# Altium PCB 5v.PcbDoc
Units mil, origin at the board's own origin, x right, y up, seen from the top; angles counter-clockwise.
Board outline 6861.22 x 4282.48 mil, 2 copper layers (Top Layer, Bottom Layer); 30 components, 12 nets, 75 pads, 0 vias.
Unrouted connection lines stored in the file: 1.
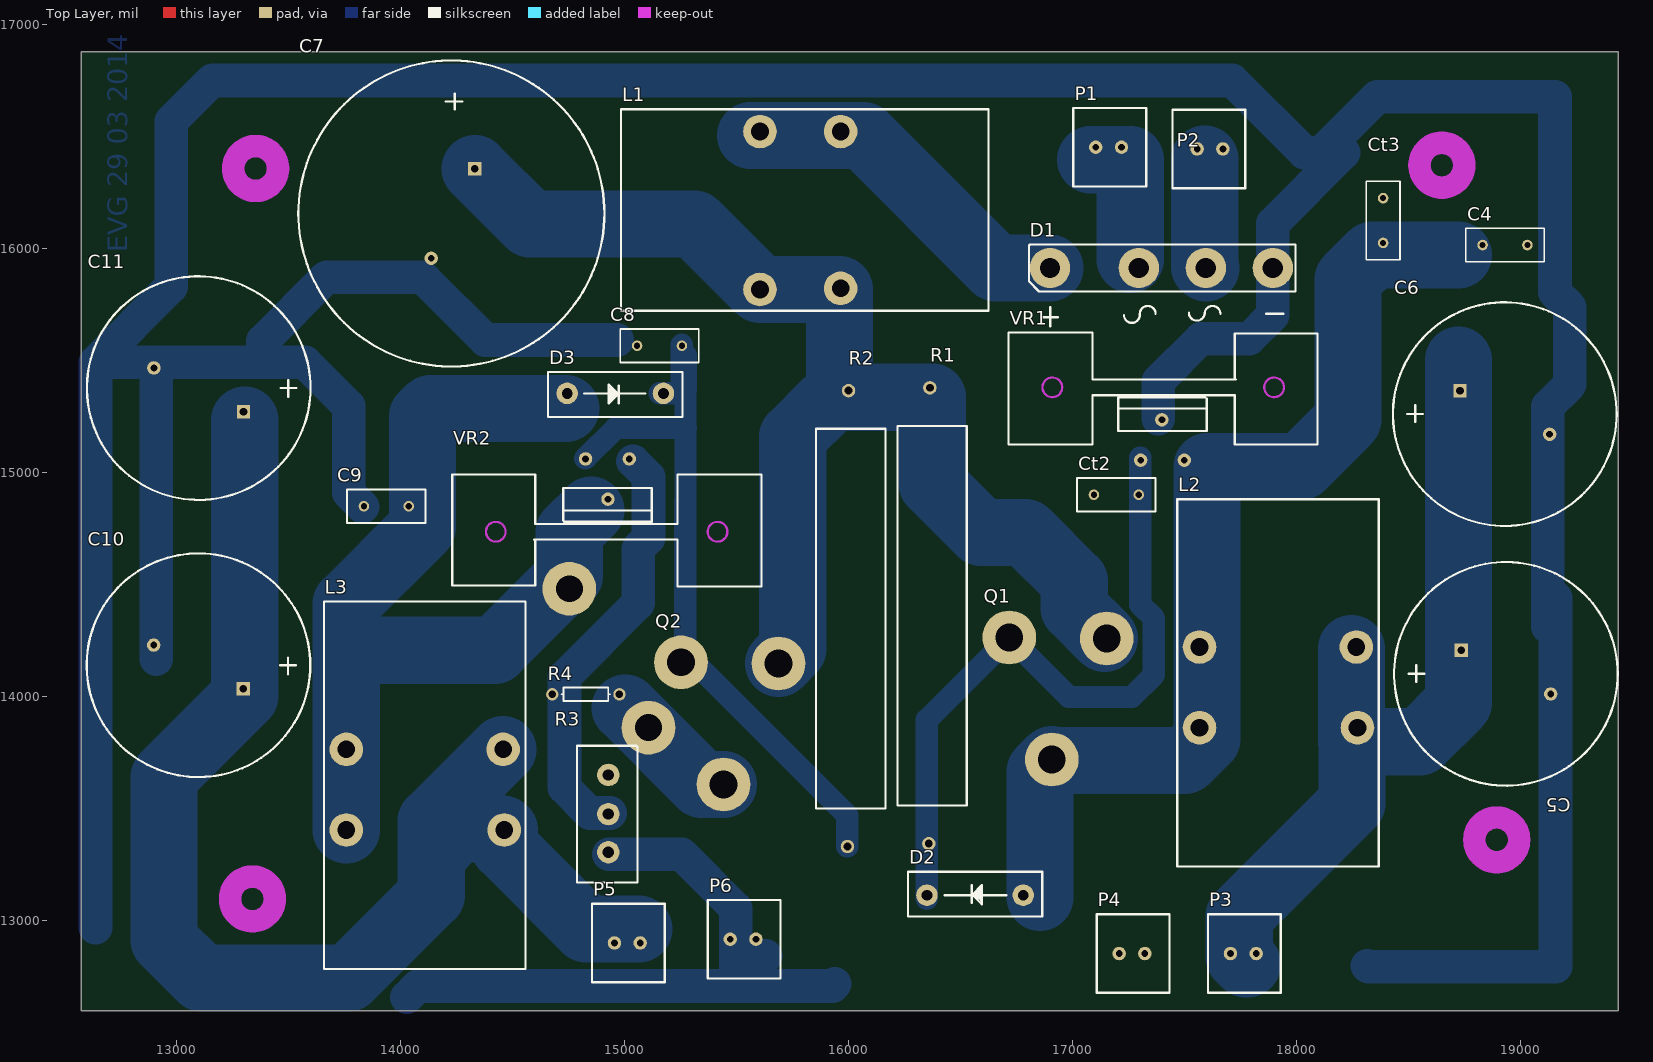
[diagram p0: Top Layer view]
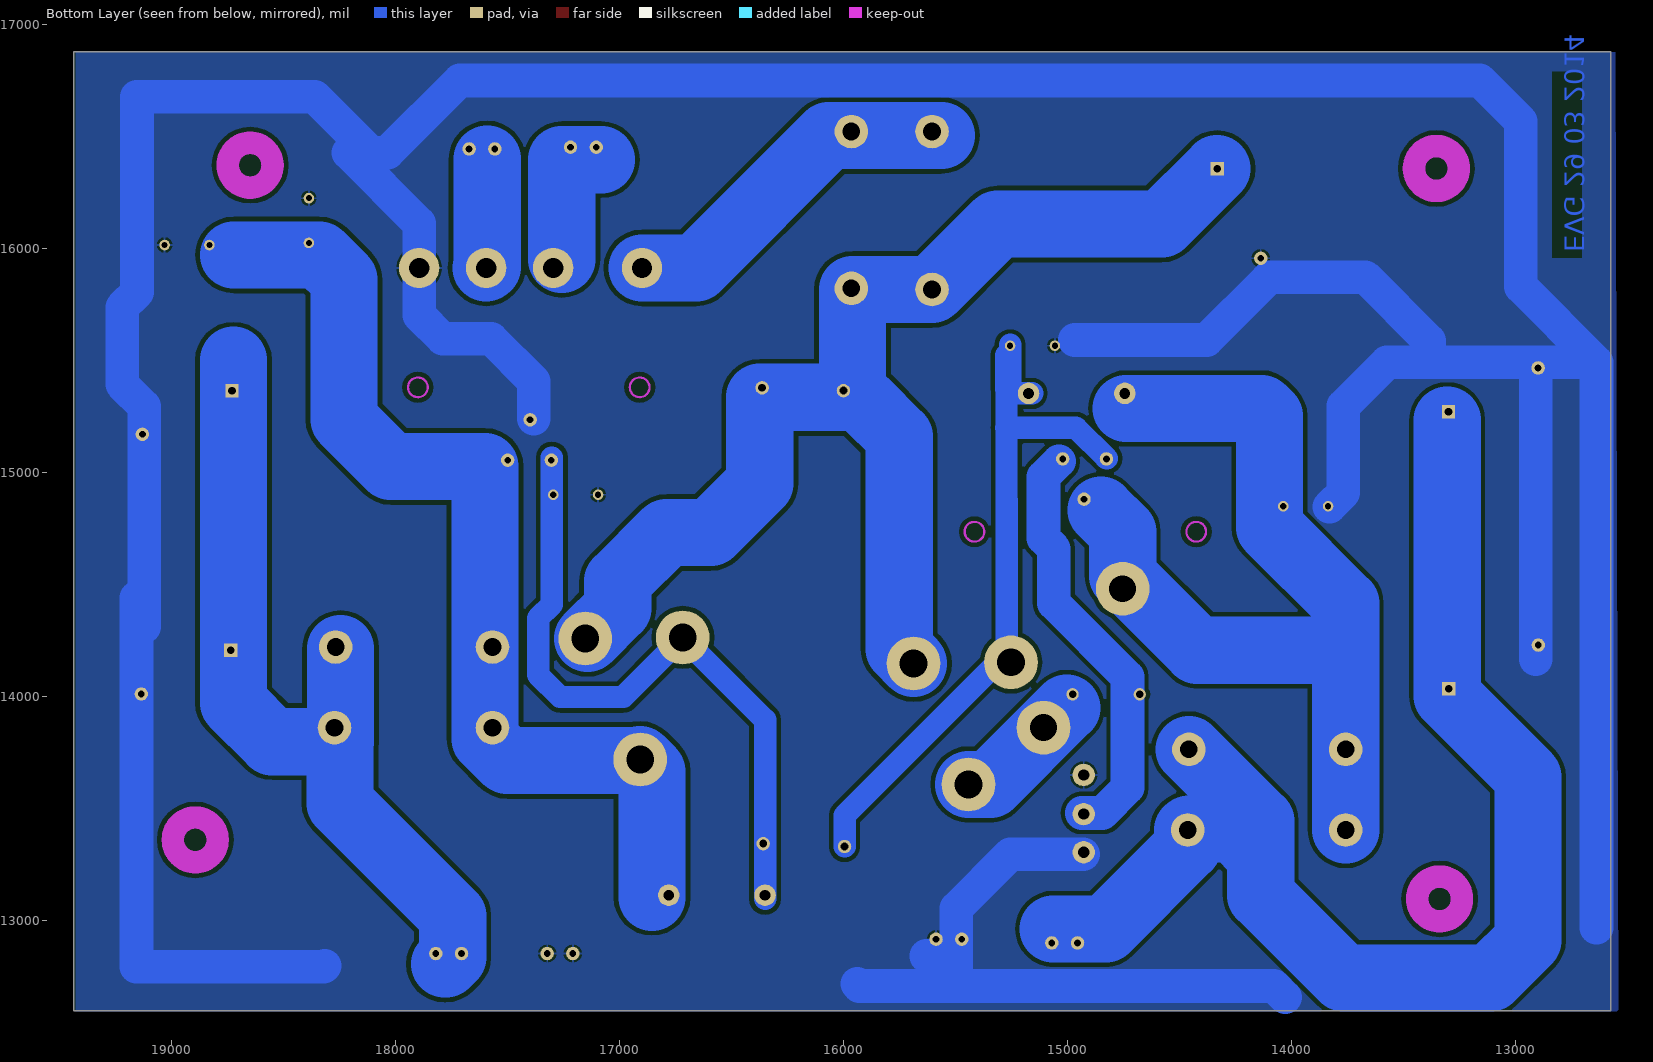
[diagram p1: Bottom Layer view, seen from below]

## Layer stack, top to bottom
Top Layer: signal copper 1.4
Dielectric: dielectric 12.6, FR-4, Dk 4.8
Bottom Layer: signal copper 1.4

## Board outline
12573.82,16879.92 19435.04,16879.92 19435.04,12597.44 12573.82,12597.44

## Design rules (kind name [scope] priority, off if disabled: settings)
Clearance [All] p1: gap=20
PolygonConnect [All] p1: connectstyle=Relief reliefconductorwidth=10 reliefentries=4 polygonreliefangle="90 Angle" airgapwidth=10
RoomDefinition 5v [InComponentClass('5v')] p1: confinementstyle=ConfineIn formatcopy=TRUE lockcomponents=FALSE outline 12736.22,12416.34 13050.2,12416.34 13050.2,12752.95 12736.22,12752.95
RoutingLayers [All] p1: top layer_v5=FALSE bottom layer_v5=TRUE
RoutingVias [All] p1: holewidth=28 width=50 viastyle="Through Hole" minholewidth=28 minwidth=50 maxholewidth=28 maxwidth=50
SolderMaskExpansion [All] p1: expansion=4
Width Width_1 [All] p1: maxlimit=400 minlimit=100 preferedwidth=350 toplayer_minwidth=300 minimp=50.000000 maximp=50.000000 favimp=50.000000
Width [All] p2: maxlimit=400 minlimit=300 preferedwidth=400
27 further rules are at their usual default settings.

## Components (designator, comment, footprint, x,y, rotation, side; value= is the part's Value field where it differs from the comment)
C4 "Cap Pol2" RAD-0.2 18929.13,16016.73 r0 top
C5 "Cap Pol1" CAP4700 18933.07,14102.36 r0 top
C6 "Cap Pol1" CAP4700 18928.15,15261.81 r0 top
C7 "Cap Pol1" Cap6800u 14225.39,16157.48 r270 top
C8 "Cap Tan" RAD-0.2 15154.53,15566.93 r180 top
C9 "Cap Pol2" RAD-0.2 13935.04,14850.39 r180 top
C10 "Cap Pol1" CAP4700 13096.46,14140.75 r180 top
C11 "Cap Pol1" CAP4700 13097.44,15377.95 r180 top
Ct2 "Cap Tan" RAD-0.2 17193.9,14901.57 r180 top
Ct3 "Cap Tan" RAD-0.2 18384.84,16125.98 r90 top
D1 "Bridge2" PCBComponent_1 16898.62,15909.45 r0 top
D2 "Diodo" SuperDiodo 16788.39,13114.17 r180 top
D3 "Diodo" SuperDiodo 14732.28,15354.33 r0 top
L1 "1mH" Bobina 16183.07,16363.19 r270 top
L2 "1mH" Bobina 17725.39,14441.93 r0 top
L3 "1mH" Bobina 13916.34,13985.24 r0 top
P1 "CA" MOLEX 17062.01,16553.15 r0 top
P2 "Entrada" MOLEX 17709.65,16345.47 r180 top
P3 "CD" MOLEX 17663.39,12953.74 r0 top
P4 "Tierra" MOLEX 17166.34,12953.74 r0 top
P5 "CD" MOLEX 14913.39,13000.98 r0 top
P6 "" MOLEX 15430.12,13017.72 r0 top
Q1 "TO-3" to3 16681.1,13884.84 r90 top
Q2 "TO-3" to3 15215.55,13773.62 r90 top
R1 "Res111" "Resist 10W" 16456.69,14979.33 r270 top
R2 "33 5W" "Resist 10W" 16093.5,14966.54 r270 top
R3 "RPot" POT2 14926.18,13306.1 r180 top
R4 "Res1" AXIAL-0.3 14825.79,14010.83 r0 top
VR1 "7805" HEATSINK 17042.32,16541.34 r0 top
VR2 "LM317" HEATSINK 15279.53,13576.77 r180 top

## Footprints (in the part's own frame and the unit in brackets; to place one, negate y for a bottom-side part, rotate by r counter-clockwise, add the part's x,y. Pads: shape width x height; smd on the part's side, far side on the other; paste and mask are expansions set on the pad)
AXIAL-0.3 [mm] "Axial Device, Thru-Hole; 2 Leads; 0.3 in Pin Spacing"
  round 1.4 hole 0.85: 1(-3.81,0) 2(3.81,0)
  silkscreen extent -2.77,-0.76 2.77,0.76
Bobina [mil]
  round 150 hole 78.74: 1(-160,-580) 2(-160,-220) 3(540,-220) 4(545,-580)
  silkscreen extent -260,-1200 640,440
CAP4700 [mil]
  rect 60x60 hole 34: 1(-200,105)
  round 60 hole 30: 2(200,-90)
  silkscreen extent -499,-499 499,499
Cap6800u [mil]
  rect 60x60 hole 34: 1(-200,105)
  round 60 hole 30: 2(200,-90)
  silkscreen extent -683,-683 683,683
HEATSINK [mil]
  round 60 hole 30: 1(260,-1485) 2(355,-1305) 3(455,-1485)
  Keep-Out Layer circle w10: c-134,-1160 r44
  Keep-Out Layer circle w10: c856,-1160 r44
  silkscreen extent -330,-1415 1050,-915
MOLEX [mil]
  round 60 hole 30: 1(40,-100) 1(155,-100)
  silkscreen extent -60,-275 265,75
PCBComponent_1 [mil]
  round 180 hole 90.55: 1(-0.52,5) 2(395.79,5) 3(994.21,5) 4(695,5)
  Top Layer lines w10: -95,100 -95,105
  silkscreen extent -95,-255 1095,110
POT2 [mil]
  round 100 hole 50: 1(0,0) 2(0,-170) 3(0,-345)
  silkscreen extent -130,-475 140,135
RAD-0.2 [mm] "Radial Cap, Thru-Hole; 2 Leads; 0.2 in Pin Spacing"
  round 1.2 hole 0.7: 1(-2.54,0) 2(2.54,0)
  silkscreen extent -4.44,-1.91 4.44,1.91
"Resist 10W" [mil]
  round 60 hole 35: 1(-400,-95) 2(1635,-100)
  silkscreen extent -230,-240 1465,70
SuperDiodo [mil]
  round 96 hole 48: 1(10,0) 2(440,0)
  silkscreen extent -75,-105 525,95
to3 [mil]
  round 240 hole 124: 1(-165,-225) 2(380,-35) 3(375,-470)

## Part data
C4 C9: library part "Cap Pol1", "Polarized Capacitor (Radial)"
C5 C6 C7 C10 C11: "Polarized Capacitor (Radial)"
C8 Ct2 Ct3: library part "Cap Pol2", "Polarized Capacitor (Axial)"
D1: "Diode Bridge"
D2 D3: library part "Diode 1N5408", "3 Amp Medium Power Silicon Rectifier Diode"
L1 L2 L3: library part Bobina
P1 P2 P3 P4 P5 P6: library part Component_1
Q1 Q2: library part PNP, "PNP Bipolar Transistor"
R1 R2: library part Res1, "Resistor"
R3: "Potentiometer"
R4: "Resistor"
VR1 VR2: library part "Volt Reg", "Voltage Regulator"

## Free pads (board coordinates)
  round 240 hole 120: 4(14751.97,14482.28) 5(15105.32,13862.2)

## Nets (pads, with @x,y where several pads share a name; then routed paths per layer and width w, separated by ;. In a path a pad name is that pad's centre, name@x,y a point inside that pad or via, vN(x,y) a via of type N, cw(c..) or ccw(c..) an arc to the next point about the centre after c; other vN are vias at no path point)
GND: C4.2 C5.2 C6.2 C7.2 C8.2 C9.2 C10.2 C11.2 Ct2.2 Ct3.2 D1.3 P4.1 P6.1 R3.1 R3.3 VR1.2 | length 24800.6
  Bottom Layer w150: 12636.81,12968.5 12636.81,15493.11 ; 12907.84,14167.32 C11.2@12907.84,15493.11 ; C9.2@13828.74,14848.82 13766.73,14910.83 13766.73,15298.23 13571.85,15493.11 13383.86,15493.11 ; 14026.68,12658.54 14076.8,12708.66 15547.28,12708.66 ; 14096.81,15873.03 13668.31,15873.03 13383.86,15588.58 13383.86,15493.11 ; 14108.82,15861.02 14377.32,15592.52 14965.55,15592.52 ; R3.1@14928.15,13297.24 15252.95,13297.24 15494.09,13056.1 15494.09,12761.85 15547.28,12708.66 ; 15514.41,12842.91 15629.41,12842.91 ; 15937.01,12718.5 15927.17,12708.66 15547.28,12708.66 ; VR1.2@17381.57,15241.26 17381.57,15409.13 17570.87,15598.43 17787.4,15598.43 17892.83,15703.86 D1.3 17892.83,16113.31 18208.86,16429.33 ; 18314.61,12799.61 18319.37,12794.84 19154.53,12794.84 19154.53,14441.93 ; 19120.08,14312.75 19120.08,15296.26 19218.5,15394.68 19218.5,15739.17 19152.2,15805.47 19152.2,16678.15 18358.27,16678.15 18109.45,16429.33 18033.27,16429.33 17711.61,16750.98 13157.48,16750.98 12974.41,16567.91 12974.41,15830.71 12636.81,15493.11 ; 12636.81,15493.11 C11.2@12907.84,15493.11 ; C11.2@12907.84,15493.11 13383.86,15493.11
NetC4_1: C4.1 Ct3.1 D2.1 L2.1 L2.2 Q1.1 VR1.3 | length 4466.4
  Bottom Layer w300: 16853.19,13105.32 16853.19,13666.93 Q1.1 16910.4,13715.55 17499.02,13715.55 17506.89,13723.43 17509.84,13723.43 17598.43,13812.01 17598.43,15028.02 18019.16,15028.02 18228.35,15237.2 18228.35,15863.19 18337.6,15972.44 18720.47,15972.44
NetC5_1: C5.1 C6.1 L2.3 L2.4 P3.1 | length 3714.4
  Bottom Layer w300: 17779.53,12807.09 17773.62,12807.09 17743.11,12837.6 17743.11,13021.65 18246.18,13524.73 L2.4@18246.18,13799.53 ; L2.3@18243.11,14215.04 18243.11,13799.53 18548.54,13799.53 18721.46,13972.44 18721.46,15501.97
NetC7_1: C7.1 L1.3 L1.4 Q1.3 Q2.3 R1.1 R2.1 | length 5516.2
  Bottom Layer w300: C7.1 14577.64,16110.24 15311.02,16110.24 L1.4 15958.07,15818.19 15958.07,15339.37 ; Q2.3 15749.77,14212.84 15749.77,15161.19 15904.72,15316.14 ; 15955.51,15336.81 16372.05,15336.81 16372.05,14951.77 16590.55,14733.27 16788.39,14733.27 17006.1,14515.55 17006.1,14394.96 Q1.3@17141.22,14259.84
NetC8_1: C8.1 D3.2 Q2.2 R2.2 VR2.3 | length 3309.8
  Bottom Layer w100: VR2.3@14822.56,15063.74 14826.22,15067.4 14827.5,15067.4 14956.38,15196.27 14956.38,15197.56 14960.59,15201.77 15271.65,15201.77 ; D3.2@15156.5,15354.33 15246.06,15354.33 15254.33,15362.6 C8.1@15254.33,15570.87 ; 15271.65,15524.61 15270.65,15201.77 15268.7,14575.79 15268.7,14194.88 15993.5,13470.08 R2.2
NetC9_1: C9.1 D3.1 L3.1 L3.2 pad.4 pad.5 Q2.1 R4.2 VR2.2 | length 4688.9
  Bottom Layer w300: L3.1 L3.2 13756.34,14207.68 ; 14736.38,15287.4 14131.89,15287.4 14096.46,15251.97 14096.46,14755.91 13756.34,14415.79 13756.34,14207.68 ; 14849.41,14832.68 14751.97,14735.24 14751.97,14540.35 14419.29,14207.68 13756.34,14207.68 ; 15001.48,13950.3 15343.15,13608.62 Q2.1
NetC10_1: C10.1 C11.1 L3.3 L3.4 P5.1 | length 5869.1
  Bottom Layer w300: 13303.35,15234.25 13303.35,14003.15 12941.93,13641.73 12941.93,12913.39 13110.24,12745.08 13766.73,12745.08 14135.83,13114.17 14135.83,13289.37 ; L3.4@14456.34,13410.24 14256.69,13410.24 14135.83,13289.37 ; L3.3 14135.83,13444.72 14135.83,13289.37 ; L3.4 14461.34,13330 14827.76,12963.58 15062.01,12963.58
NetCt2_1: Ct2.1 D2.2 Q1.2 R1.2 VR1.1 | length 3111.4
  Bottom Layer w100: D2.2@16348.43,13097.44 16348.43,13897.16 Q1.2 16981.93,13999.02 17262.8,13999.02 17361.22,14097.44 17361.22,14350.97 17300.2,14411.99 VR1.1@17300.2,15067.91
NetD1_1: D1.1 L1.1 L1.2 | length 1582.1
  Bottom Layer w300: L1.1@15561.02,16505.98 16064.1,16505.98 16655.63,15914.45 D1.1
NetD1_2: D1.2 P1.1 | length 620.9
  Bottom Layer w300: 17079.72,16397.64 17255.91,16397.64 D1.2@17255.91,15952.95
NetD1_4: D1.4 P2.1 | length 488
  Bottom Layer w300: 17589.09,16400.59 17589.09,15918.98 D1.4
NetR3_2: R3.2 R4.1 VR2.1 | length 1891.7
  Bottom Layer w150: R3.2@14934.06,13481.3 14842.72,13481.3 14730.32,13593.7 14730.32,14088.58 15059.06,14417.32 15059.06,14661.39 15105.24,14707.57 15105.24,14982.14 VR2.1@15036.2,15051.18

## Polygon pours and split planes (outlines as drawn)
GND on Bottom Layer "Top Layer-No Net" (solid, pour order 8): 12553.96,16877.81 19425.02,16877.81 19429.94,16882.74 19425.02,16877.81 19425.02,12595.33 12544.11,12595.33 12539.19,12600.25

## Keep-outs
Keep-Out Layer:
  circle w100: c18892.13,13361.22 r100
  circle w100: c13351.77,16358.27 r100
  circle w100: c18647.05,16373.03 r100
  circle w100: c13337.01,13097.44 r100

## Other copper
Bottom Layer:
  text "EVG 29 03 2014" at 12807.09,15984.25 h150 r90